# Altium PCB EHR.PcbDoc (part 3 of 4)
Units mm, origin at the board's own origin, x right, y up, seen from the top; angles counter-clockwise.
Board outline 200 x 110 mm, 2 copper layers (Top Layer, Bottom Layer), stack 1.646 mm thick; 17 components, 171 nets, 955 pads, 288 vias.
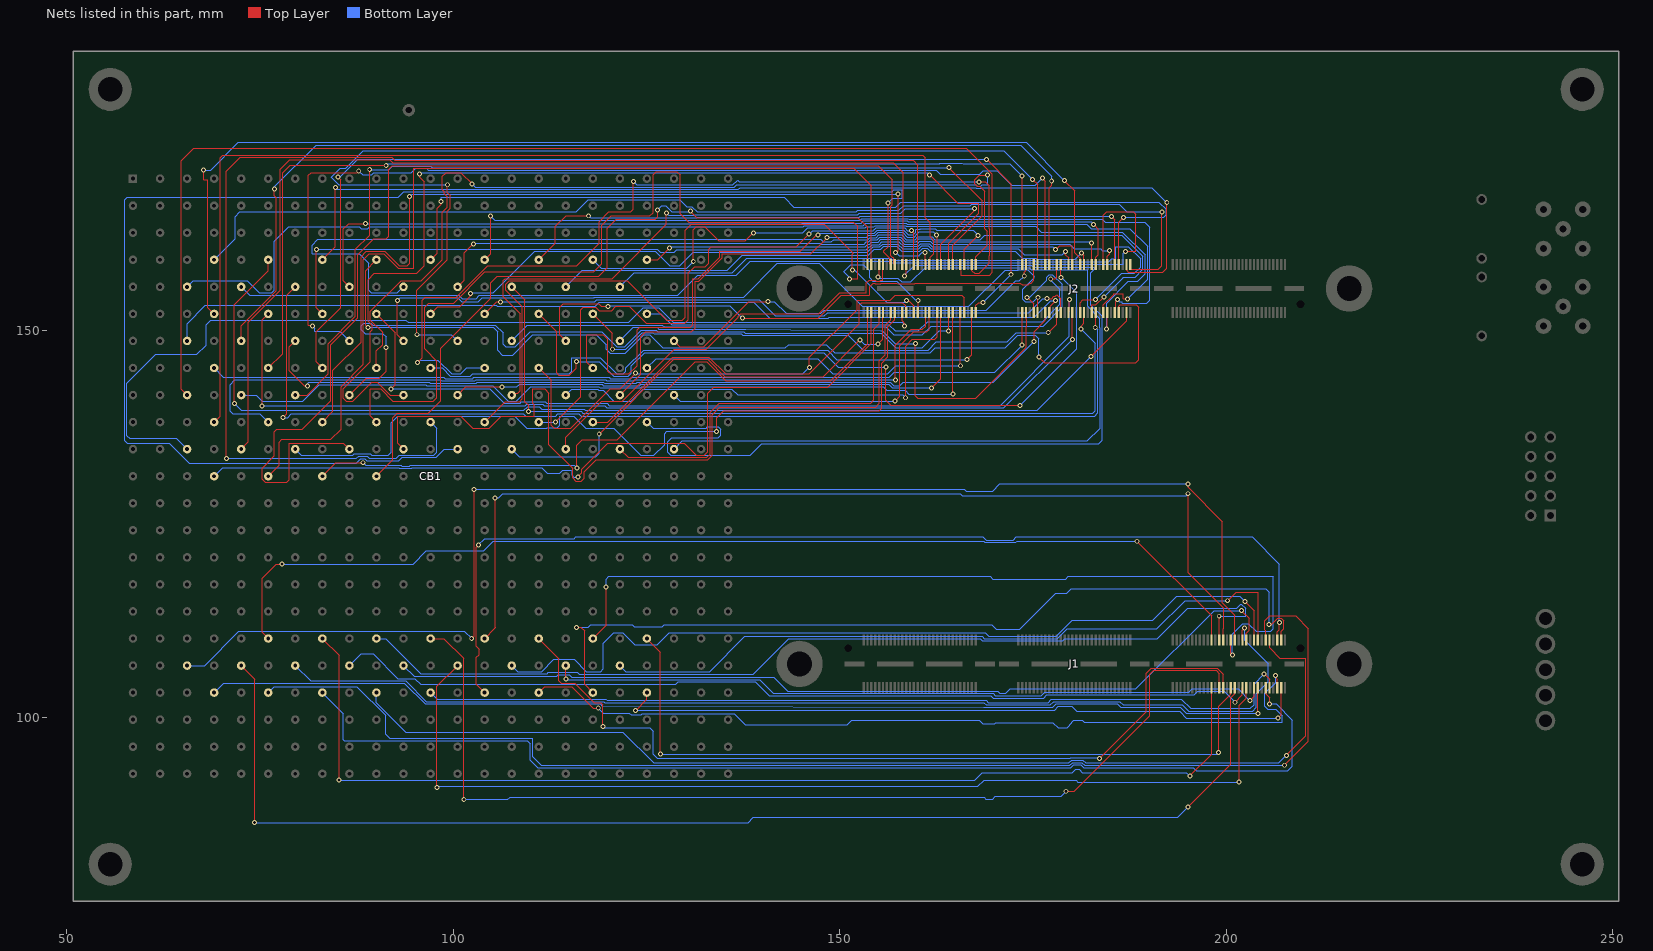
[diagram p3: the nets of this part, all layers, seen from the top]

## Via types
v1: diameter 0.64, hole 0.39, Top Layer to Bottom Layer, 288 vias

## Nets (pads, with @x,y where several pads share a name; then routed paths per layer and width w, separated by ;. In a path a pad name is that pad's centre, name@x,y a point inside that pad or via, vN(x,y) a via of type N, cw(c..) or ccw(c..) an arc to the next point about the centre after c; other vN are vias at no path point) (continued)
J1_141: CB1.397 J1.141 | length 140.2
  Top Layer w0.15: CB1.397@76.047,110.2 75.26,110.987 75.26,117.968 77.104,119.812 v1(77.8,119.812) ; v1(188.443,122.784) 198.091,113.135 J1.141@198.091,110.001
  Bottom Layer w0.15: v1(77.8,119.812) 94.793,119.812 96.52,121.539 103.915,121.539 105.159,122.784 168.616,122.784 168.775,122.624 172.771,122.624 172.93,122.784 v1(188.443,122.784)
J1_142: CB1.399 J1.142 | length 142.8
  Top Layer w0.15: CB1.399@83.047,110.2 85.204,108.043 v1(85.204,91.872) ; v1(195.296,92.413) 198.091,95.208 J1.142@198.091,103.829
  Bottom Layer w0.15: v1(85.204,91.872) 167.47,91.872 168.459,92.861 180.102,92.861 180.495,93.255 180.947,93.255 181.34,92.861 194.848,92.861 v1(195.296,92.413)
J1_145: CB1.401 J1.145 | length 126.3
  Top Layer w0.15: J1.145@199.092,110.001 v1(199.092,113.081)
  Bottom Layer w0.15: CB1.401@90.047,110.2 91.234,110.2 95.809,105.625 112.116,105.625 112.307,105.816 116.002,105.816 116.256,105.562 138.769,105.562 143.367,110.16 168.158,110.16 168.43,109.888 178.823,109.888 179.095,110.16 191.048,110.16 195.01,114.122 201.371,114.122 201.905,114.656 201.955,114.656 202.514,114.097 202.514,113.106 202.489,113.081 v1(199.092,113.081)
J1_146: CB1.403 J1.146 | length 133.6
  Top Layer w0.15: CB1.403@97.047,110.2 98.785,110.2 101.346,107.639 v1(101.346,89.375) ; v1(179.273,90.437) 180.327,90.437 190.119,100.228 190.119,105.58 190.611,106.073 198.673,106.073 199.092,105.654 J1.146@199.092,103.829
  Bottom Layer w0.15: v1(101.346,89.375) 107.056,89.375 107.344,89.662 168.67,89.662 168.91,89.422 169.76,89.422 170.124,89.786 178.623,89.786 v1(179.273,90.437)
J1_147: CB1.405 J1.147 | length 129.7
  Top Layer w0.15: CB1.405@104.047,110.2 105.448,111.601 105.422,111.627 105.422,128.385 v1(105.41,128.397) ; v1(195.072,128.93) 195.072,118.686 199.644,114.114 199.644,111.507 199.592,111.455 J1.147@199.592,110.001
  Bottom Layer w0.15: v1(105.41,128.397) 105.867,128.397 106.395,128.925 165.568,128.925 165.837,128.656 194.798,128.656 v1(195.072,128.93)
J1_148: CB1.407 J1.148 | length 109.9
  Top Layer w0.15: CB1.407@111.047,110.2 113.64,107.607 113.64,104.737 113.983,104.394 115.722,104.394 118.199,101.917 119.037,101.917 119.355,101.6 v1(119.355,98.793) ; v1(183.617,94.691) 189.664,100.738 189.664,105.727 190.309,106.372 198.822,106.372 199.592,105.603 J1.148@199.592,103.829
  Bottom Layer w0.15: v1(119.355,98.793) 119.523,98.625 125.412,98.625 125.832,98.206 125.832,95.225 126.365,94.691 179.81,94.691 179.874,94.755 183.553,94.755 v1(183.617,94.691)
J1_151: CB1.409 J1.151 | length 113
  Top Layer w0.15: CB1.409@118.047,110.2 119.785,111.938 119.761,111.962 v1(119.761,116.84) ; J1.151@200.593,110.001 200.593,108.271 v1(200.787,108.077)
  Bottom Layer w0.15: v1(119.761,116.84) 119.761,117.896 120.102,118.237 169.446,118.237 169.818,117.865 179.205,117.865 179.577,118.237 206.045,118.237 206.082,118.2 206.082,111.455 205.752,111.125 203.86,111.125 202.87,112.116 202.159,112.116 201.041,110.998 201.048,110.991 200.787,110.729 v1(200.787,108.077)
J1_152: CB1.411 J1.152 | length 97
  Top Layer w0.15: CB1.411@125.047,110.2 126.797,108.45 v1(126.797,95.25) ; v1(199.012,95.479) 199.012,101.412 200.593,102.993 J1.152@200.593,103.829
  Bottom Layer w0.15: v1(126.797,95.25) 198.783,95.25 v1(199.012,95.479)
J1_153: CB1.417 J1.153 | length 174
  Top Layer w0.15: v1(102.375,110.211) 102.672,110.508 102.672,129.438 v1(102.692,129.458) ; v1(195.072,130.175) 195.072,129.743 199.48,125.335 199.48,114.82 201.093,113.207 J1.153@201.093,110.001
  Bottom Layer w0.15: CB1.417@65.547,106.7 67.813,106.7 72.263,111.15 101.435,111.15 v1(102.375,110.211) ; v1(102.692,129.458) 102.759,129.525 166.12,129.525 166.375,129.27 169.779,129.27 170.711,130.203 195.044,130.203 v1(195.072,130.175)
J1_154: CB1.419 J1.154 | length 160.6
  Top Layer w0.15: CB1.419@72.547,106.7 74.295,104.952 v1(74.295,86.385) ; v1(195.072,88.417) 200.584,93.929 200.584,102.54 201.093,103.049 J1.154@201.093,103.829
  Bottom Layer w0.15: v1(74.295,86.385) 138.141,86.385 138.821,87.065 193.72,87.065 v1(195.072,88.417)
J1_157: CB1.421 J1.157 | length 141.2
  Top Layer w0.15: J1.157@202.094,110.001 202.094,111.263 v1(202.387,111.557)
  Bottom Layer w0.15: CB1.421@79.547,106.7 81.528,104.719 93.81,104.719 96.491,102.039 119.431,102.039 119.59,101.879 168.642,101.879 168.922,101.6 177.259,101.6 177.689,102.029 186.222,102.029 186.652,101.6 194.337,101.6 195.118,100.818 203.397,100.818 203.893,101.314 203.893,103.054 205.461,104.622 205.461,106.911 202.387,109.984 v1(202.387,111.557)
J1_158: CB1.423 J1.158 | length 121.1
  Top Layer w0.15: v1(201.143,101.952) 202.094,102.903 J1.158@202.094,103.829
  Bottom Layer w0.15: CB1.423@86.547,106.7 88.076,108.229 89.624,108.229 92.834,105.019 95.03,105.019 95.774,104.275 128.763,104.275 129.071,104.583 139.086,104.583 140.88,102.79 169.532,102.79 169.822,102.5 176.359,102.5 176.789,102.929 195.842,102.929 196.299,103.386 199.708,103.386 v1(201.143,101.952)
J1_159: CB1.425 J1.159 | length 118.9
  Top Layer w0.15: v1(201.955,113.817) 202.956,112.816 202.956,111.237 202.594,110.875 J1.159@202.594,110.001
  Bottom Layer w0.15: CB1.425@93.547,106.7 94.922,105.325 113.397,105.325 113.57,105.498 115.025,105.498 115.322,105.201 141.458,105.201 143.269,103.39 170.422,103.39 170.713,103.1 171.482,103.1 172.065,103.683 188.316,103.683 198.45,113.817 v1(201.955,113.817)
J1_160: CB1.427 J1.160 | length 133.8
  Top Layer w0.15: v1(97.866,90.907) 97.866,104.019 CB1.427@100.547,106.7 ; v1(201.676,91.617) 201.676,101.545 202.594,102.464 J1.160@202.594,103.829
  Bottom Layer w0.15: v1(97.866,90.907) 98.025,91.066 107.056,91.066 107.063,91.059 167.863,91.059 168.662,91.858 180.566,91.858 180.807,91.617 v1(201.676,91.617)
J1_163: CB1.429 J1.163 | length 109.9
  Top Layer w0.15: v1(202.438,114.96) 203.595,113.803 J1.163@203.595,110.001
  Bottom Layer w0.15: CB1.429@107.547,106.7 108.322,105.925 111.437,105.925 113.005,107.493 115.621,107.493 117.196,105.918 119.062,105.918 119.405,106.261 119.405,109.603 120.777,110.975 121.92,110.975 123.472,109.423 126.363,109.423 127.914,110.975 168.806,110.975 169.293,110.488 177.988,110.488 180.048,112.547 190.5,112.547 193.599,115.646 201.752,115.646 v1(202.438,114.96)
J1_164: CB1.431 J1.164 | length 94
  Top Layer w0.15: CB1.431@114.547,106.7 114.547,104.96 v1(114.554,104.953) ; v1(203.048,102.159) 203.595,102.706 J1.164@203.595,103.829
  Bottom Layer w0.15: v1(114.554,104.953) 114.623,104.883 139.611,104.883 141.405,103.09 169.832,103.09 170.122,102.8 176.059,102.8 176.488,103.229 195.152,103.229 195.609,103.686 201.52,103.686 v1(203.048,102.159)
J1_165: CB1.433 J1.165 | length 93.6
  Top Layer w0.15: v1(200.177,115.087) 201.295,116.205 204.089,116.205 J1.165@204.095,110.001
  Bottom Layer w0.15: CB1.433@121.547,106.7 122.329,105.918 133.147,105.918 137.693,110.465 168.427,110.465 168.704,110.188 178.133,110.188 179.4,111.455 191.033,111.455 194.666,115.087 v1(200.177,115.087)
J1_166: CB1.441 J1.166 | length 140.8
  Top Layer w0.15: v1(204.095,100.518) J1.166@204.095,103.829
  Bottom Layer w0.15: CB1.441@69.047,103.2 70.266,104.419 93.671,104.419 96.352,101.739 118.974,101.739 119.29,101.422 168.622,101.3 177.559,101.3 177.989,101.729 185.922,101.729 186.352,101.3 194.037,101.3 194.818,100.518 v1(204.095,100.518)
J1_169: CB1.443 J1.169 | length 167.1
  Top Layer w0.15: J1.169@205.096,110.001 205.096,111.25 204.992,111.355 204.992,112.497 205.608,113.113 208.959,113.113 210.591,111.481 210.591,96.876 v1(207.518,93.802)
  Bottom Layer w0.15: CB1.443@76.047,103.2 76.835,103.988 87.528,103.988 91.249,100.267 91.249,97.816 91.757,97.307 110.236,97.307 110.261,97.282 110.261,94.932 111.392,93.802 179.77,93.802 180.122,94.155 181.32,94.155 181.672,93.802 v1(207.518,93.802)
J1_170: CB1.445 J1.170 | length 145.5
  Top Layer w0.15: J1.170@205.096,103.829 205.096,103.082 205.613,102.565 v1(205.613,101.727)
  Bottom Layer w0.15: CB1.445@83.047,103.2 85.75,100.497 85.75,97.079 85.852,96.977 109.537,96.977 109.931,96.584 109.931,94.463 110.896,93.497 179.889,93.497 180.247,93.855 181.195,93.855 181.553,93.497 195.723,93.497 196.116,93.105 207.976,93.105 208.534,93.662 208.534,99.644 206.451,101.727 v1(205.613,101.727)
J1_171: CB1.447 J1.171 | length 142.8
  Top Layer w0.15: J1.171@205.596,110.001 205.596,108.974 206.9,107.671 210.261,107.671 210.287,107.645 210.287,97.587 v1(207.772,95.072)
  Bottom Layer w0.15: CB1.447@90.047,103.2 90.047,101.908 93.86,98.095 121.92,98.095 125.908,94.107 179.65,94.107 179.998,94.455 181.444,94.455 181.792,94.107 206.807,94.107 v1(207.772,95.072)
J1_172: CB1.449 J1.172 | length 114.5
  Top Layer w0.15: v1(204.911,105.613) 205.596,104.927 J1.172@205.596,103.829
  Bottom Layer w0.15: CB1.449@97.047,103.2 97.908,102.339 119.741,102.339 119.89,102.19 168.932,102.19 169.222,101.9 176.959,101.9 177.389,102.329 194.208,102.329 195.381,101.155 203.097,101.155 203.593,101.651 203.593,104.295 v1(204.911,105.613)
J1_175: CB1.451 J1.175 | length 135.7
  Top Layer w0.15: v1(103.251,122.301) 102.972,122.022 102.972,109.17 103.334,108.808 103.334,108.108 102.972,107.746 102.972,104.275 CB1.451@104.047,103.2 ; J1.175@206.597,110.001 206.597,111.055 206.883,111.341 v1(206.883,112.268)
  Bottom Layer w0.15: v1(103.251,122.301) 104.075,123.125 115.622,123.125 115.839,123.342 168.515,123.342 168.916,122.942 172.445,122.942 172.846,123.342 203.352,123.342 206.883,119.812 v1(206.883,112.268)
J1_176: CB1.453 J1.176 | length 109.9
  Top Layer w0.15: CB1.453@111.047,103.2 111.835,103.988 115.316,103.988 118.11,101.194 v1(118.745,101.194) ; v1(206.375,105.41) 206.375,105.162 206.597,104.94 J1.176@206.597,103.829
  Bottom Layer w0.15: v1(118.745,101.194) 119.38,100.559 122.758,100.559 123.012,100.305 124.282,100.305 124.46,100.482 136.322,100.482 137.781,99.023 150.955,99.023 151.576,99.643 168.032,99.643 168.5,99.175 170.04,99.175 170.19,99.326 170.207,99.326 177.569,99.326 178.252,98.642 179.423,98.642 179.742,98.961 179.742,99.071 180.276,99.605 181.366,99.605 181.632,99.339 207.213,99.339 207.239,99.365 207.239,100.228 206.412,101.055 205.387,101.055 205.003,101.439 205.003,103.136 206.375,104.507 v1(206.375,105.41)
J1_177: CB1.455 J1.177 | length 111.3
  Top Layer w0.15: v1(115.951,111.633) 116.51,111.633 116.967,111.176 116.967,104.28 CB1.455@118.047,103.2 ; v1(205.537,111.988) 205.832,111.988 206.657,112.813 207.109,112.813 207.428,112.494 207.428,111.462 207.098,111.131 J1.177@207.098,110.001
  Bottom Layer w0.15: v1(115.951,111.633) 117.424,111.633 117.751,111.96 123.137,111.96 123.372,111.725 127.022,111.725 127.257,111.96 169.664,111.96 170.219,111.405 173.294,111.405 177.946,116.058 179.364,116.058 179.944,116.637 205.105,116.637 205.537,116.205 v1(205.537,111.988)
J1_178: CB1.457 J1.178 | length 91
  Top Layer w0.15: v1(123.571,100.863) 125.047,102.339 CB1.457@125.047,103.2 ; v1(206.68,99.898) 207.098,100.316 J1.178@207.098,103.829
  Bottom Layer w0.15: v1(123.571,100.863) 123.654,100.946 177.806,100.946 178.289,101.429 179.991,101.429 180.664,100.757 193.98,100.757 194.838,99.898 v1(206.68,99.898)
J2_62: CB1.73 J2.62 | length 140.8
  Top Layer w0.15: J2.62@187.596,158.571 187.596,157.988 191.224,157.988 191.668,158.433 v1(191.668,165.405)
  Bottom Layer w0.15: CB1.73@69.047,159.2 71.772,161.925 71.772,164.787 72.39,165.405 115.905,165.405 117.475,166.975 129.322,166.975 130.203,166.094 130.848,166.094 131.537,165.405 152.146,165.405 152.349,165.608 157.653,165.608 158.249,166.204 166.879,166.204 167.042,166.367 186.132,166.367 187.094,165.405 v1(191.668,165.405)
J2_63: CB1.75 J2.63 | length 142.5
  Top Layer w0.15: v1(71.679,140.614) 71.679,153.391 76.047,157.759 CB1.75@76.047,159.2 ; v1(182.499,146.685) 187.095,151.281 J2.63@187.095,152.399
  Bottom Layer w0.15: v1(71.679,140.614) 72.568,139.725 109.11,139.725 109.591,140.207 111.111,140.207 111.442,139.875 116.91,139.875 117.06,139.725 175.539,139.725 v1(182.499,146.685)
J2_64: CB1.77 J2.64 | length 133.4
  Top Layer w0.15: CB1.77@83.047,159.2 84.722,160.875 v1(84.722,168.529) ; J2.64@187.095,158.571 187.095,157.836 187.324,157.607 191.795,157.607 192.303,158.115 v1(192.303,166.599)
  Bottom Layer w0.15: v1(84.722,168.529) 84.941,168.31 136.888,168.31 137.114,168.536 167.581,168.536 167.671,168.446 168.371,168.446 168.461,168.536 190.366,168.536 v1(192.303,166.599)
J2_67: CB1.79 J2.67 | length 131.2
  Top Layer w0.15: v1(88.951,150.444) 88.656,150.739 88.656,157.809 CB1.79@90.047,159.2 ; v1(175.768,146.596) 176.517,145.847 188.278,145.847 188.697,146.266 188.697,153.035 188.366,153.365 186.298,153.365 186.094,153.162 J2.67@186.094,152.399
  Bottom Layer w0.15: v1(88.951,150.444) 105.131,150.444 105.715,149.86 105.715,147.498 106.35,146.863 107.671,146.863 110.287,149.479 118.509,149.479 119.753,148.236 119.753,147.637 120.31,147.08 122.23,147.08 124.625,149.475 125.412,149.475 127.094,147.793 142.948,147.793 143.377,148.221 148.273,148.221 149.353,147.141 161.67,147.141 162.358,147.829 171.389,147.829 173.025,149.465 175.26,149.465 175.768,148.957 v1(175.768,146.596)
J2_68: CB1.81 J2.68 | length 116.4
  Top Layer w0.15: CB1.81@97.047,159.2 97.917,160.07 97.917,165.862 98.425,166.37 v1(98.425,166.751) ; J2.68@186.094,158.571 186.094,164.05 v1(186.727,164.682)
  Bottom Layer w0.15: v1(98.425,166.751) 98.425,167.275 142.783,167.275 144.03,166.028 157.258,166.028 157.897,166.667 191.295,166.667 192.227,165.735 192.227,164.998 191.911,164.682 v1(186.727,164.682)
J2_69: CB1.83 J2.69 | length 107.9
  Top Layer w0.15: CB1.83@104.047,159.2 104.826,159.979 v1(104.826,164.846) ; J2.69@185.594,152.399 185.674,152.479 185.674,153.797 v1(185.928,154.051)
  Bottom Layer w0.15: v1(104.826,164.846) 105.334,164.338 152.654,164.338 152.849,164.533 158.872,164.533 158.968,164.437 183.949,164.437 184.328,164.059 189.484,164.059 190.119,163.424 190.119,153.987 189.7,153.568 186.563,153.568 186.563,153.797 186.182,153.797 v1(185.928,154.051)
J2_70: CB1.85 J2.70 | length 84.4
  Top Layer w0.15: CB1.85@111.047,159.2 113.208,161.361 113.208,163.512 114.592,164.897 v1(117.5,164.897) ; v1(185.134,164.827) 185.594,164.367 J2.70@185.594,158.571
  Bottom Layer w0.15: v1(117.5,164.897) 117.759,164.638 131.506,164.638 131.58,164.712 152.527,164.712 152.661,164.846 159.366,164.846 159.385,164.827 v1(185.134,164.827)
J2_73: CB1.87 J2.73 | length 94.2
  Top Layer w0.15: v1(131.039,158.979) 131.039,163.093 131.42,163.475 132.511,163.475 134.315,161.671 137.795,161.671 v1(138.811,162.687) ; v1(184.531,150.241) 184.593,150.303 J2.73@184.593,152.399
  Bottom Layer w0.15: CB1.87@118.047,159.2 119.122,158.125 130.185,158.125 v1(131.039,158.979) ; v1(138.811,162.687) 145.212,162.687 145.859,163.334 153.289,163.334 153.404,163.449 154.386,163.449 154.57,163.633 158.499,163.633 158.62,163.511 175.35,163.511 176.073,162.789 186.563,162.789 189.516,159.835 189.516,157.404 188.537,156.425 187.325,156.425 184.506,153.605 184.531,153.58 v1(184.531,150.241)
J2_74: CB1.89 J2.74 | length 63.8
  Top Layer w0.15: CB1.89@125.047,159.2 126.459,159.2 v1(127.991,160.731) ; J2.74@184.593,158.571 184.593,159.65 184.912,159.969 v1(184.912,160.401)
  Bottom Layer w0.15: v1(127.991,160.731) 128.168,160.909 153.289,160.909 153.591,161.211 153.842,161.211 154.098,161.466 154.949,161.466 155.316,161.833 157.753,161.833 158.365,161.221 159.992,161.221 160.363,161.592 161.68,161.592 162.061,161.211 179.758,161.211 180.34,160.63 183.744,160.63 183.972,160.401 v1(184.912,160.401)
J2_75: CB1.95 J2.75 | length 147.5
  Top Layer w0.15: J2.75@184.093,152.399 184.093,153.365 185.42,154.692 185.42,154.813 186.69,154.813 186.69,154.138 v1(187.244,154.138)
  Bottom Layer w0.15: CB1.95@65.547,155.7 66.336,156.489 73.33,156.489 74.905,154.915 76.517,154.915 76.835,155.232 76.835,161.625 78.71,163.5 87.826,163.5 88.08,163.246 88.916,163.246 89.17,163.5 145.29,163.5 145.424,163.634 153.035,163.634 153.334,163.933 158.623,163.933 158.745,163.811 181.973,163.811 182.537,163.247 187.527,163.247 189.816,160.958 189.816,156.711 v1(187.244,154.138)
J2_76: CB1.97 J2.76 | length 135.8
  Top Layer w0.15: J2.76@184.093,158.571 184.093,164.967 184.544,165.417 187.947,165.417 188.265,165.1 188.265,160.274 v1(186.944,160.274)
  Bottom Layer w0.15: CB1.97@72.547,155.7 73.637,154.61 100.711,154.61 101.143,154.178 102.946,154.178 103.378,154.61 117.96,154.61 117.983,154.633 129.029,154.633 131.622,157.225 136.625,157.225 138.43,159.029 156.316,159.029 156.525,158.82 175.057,158.82 175.282,158.596 186.69,158.596 186.69,160.02 v1(186.944,160.274)
J2_79: CB1.99 J2.79 | length 136.8
  Top Layer w0.15: v1(77.978,138.788) 78.472,139.282 78.472,154.625 CB1.99@79.547,155.7 ; v1(183.05,150.447) 183.092,150.489 J2.79@183.092,152.399
  Bottom Layer w0.15: v1(77.978,138.788) 78.565,138.788 79.052,139.275 109.057,139.275 109.343,138.989 113.218,138.989 113.504,139.275 116.233,139.275 116.519,138.989 182.969,138.989 183.363,139.382 183.363,150.134 v1(183.05,150.447)
J2_80: CB1.101 J2.80 | length 111.2
  Top Layer w0.15: CB1.101@86.547,155.7 85.75,156.497 85.75,163.195 86.436,163.881 v1(88.621,163.881) ; v1(182.829,163.792) 183.464,163.157 183.464,159.884 183.092,159.512 J2.80@183.092,158.571
  Bottom Layer w0.15: v1(88.621,163.881) 145.071,163.881 145.124,163.934 152.758,163.934 153.057,164.233 158.747,164.233 158.869,164.111 182.51,164.111 v1(182.829,163.792)
J2_81: CB1.103 J2.81 | length 138.9
  Top Layer w0.15: J2.81@182.592,152.399 182.592,153.318 182.626,153.352 183.146,153.352 v1(184.207,154.413)
  Bottom Layer w0.15: CB1.103@93.547,155.7 92.762,154.915 89.37,154.915 89.027,155.257 89.027,158.775 87.808,159.995 82.601,159.995 82.575,159.969 81.737,159.969 81.712,159.995 81.712,161.112 82.448,161.849 147.509,161.849 147.825,161.532 148.916,161.532 149.195,161.812 153.594,161.812 153.849,162.066 154.7,162.066 155.067,162.433 158.002,162.433 158.613,161.821 159.744,161.821 160.114,162.192 161.929,162.192 162.309,161.812 168.193,161.812 168.763,162.382 186.488,162.382 189.216,159.654 189.216,157.949 188.239,156.972 186.69,156.972 186.69,156.897 v1(184.207,154.413)
J2_82: CB1.105 J2.82 | length 90.3
  Top Layer w0.15: CB1.105@100.547,155.7 101.422,156.575 101.422,160.096 v1(102.591,161.265) ; J2.82@182.592,158.571 v1(182.592,161.392)
  Bottom Layer w0.15: v1(102.591,161.265) 102.677,161.351 147.407,161.351 147.525,161.232 153.162,161.232 153.441,161.511 153.718,161.511 153.973,161.766 154.825,161.766 155.191,162.133 157.878,162.133 158.489,161.521 159.868,161.521 160.239,161.892 161.804,161.892 162.185,161.511 182.472,161.511 v1(182.592,161.392)
J2_85: CB1.107 J2.85 | length 104.2
  Top Layer w0.15: CB1.107@107.547,155.7 109.236,154.011 109.236,140.84 109.728,140.348 v1(109.728,139.573) ; v1(181.229,150.241) 181.229,150.622 181.591,150.984 J2.85@181.591,152.399
  Bottom Layer w0.15: v1(109.728,139.573) 109.73,139.575 116.529,139.575 116.76,139.344 182.702,139.344 183.058,139.7 183.058,148.412 v1(181.229,150.241)
J2_86: CB1.109 J2.86 | length 71.9
  Top Layer w0.15: v1(181.28,160.083) 181.591,159.772 J2.86@181.591,158.571
  Bottom Layer w0.15: CB1.109@114.547,155.7 116.672,157.825 135.422,157.825 137.363,159.766 153.67,159.766 154.47,160.566 155.322,160.566 155.688,160.933 157.38,160.933 157.992,160.321 160.365,160.321 160.736,160.692 161.307,160.692 161.688,160.311 172.685,160.311 173.576,159.42 175.375,159.42 175.536,159.259 180.455,159.259 v1(181.28,160.083)
J2_87: CB1.111 J2.87 | length 83.5
  Top Layer w0.15: J2.87@181.091,152.399 181.091,153.67 181.459,154.038 v1(183.059,154.038)
  Bottom Layer w0.15: CB1.111@121.547,155.7 123.372,157.525 136.082,157.525 137.936,159.379 156.566,159.379 156.825,159.12 175.218,159.12 175.38,158.959 184.782,158.959 185.183,159.36 185.674,159.36 185.674,160.909 187.325,160.909 188.916,159.318 188.916,158.258 188.103,157.445 186.466,157.445 v1(183.059,154.038)
J2_88: CB1.119 J2.88 | length 146.1
  Top Layer w0.15: v1(67.691,170.815) 67.691,169.545 68.25,169.545 68.25,152.997 CB1.119@69.047,152.2 ; v1(179.07,169.443) 180.391,168.123 180.391,160.122 181.091,159.422 J2.88@181.091,158.571
  Bottom Layer w0.15: v1(67.691,170.815) 68.58,170.815 72.161,174.396 174.117,174.396 v1(179.07,169.443)
J2_91: CB1.121 J2.91 | length 124.5
  Top Layer w0.15: v1(75.26,140.31) 75.26,151.413 CB1.121@76.047,152.2 ; v1(180.09,148.873) J2.91@180.09,152.399
  Bottom Layer w0.15: v1(75.26,140.31) 109.27,140.31 109.467,140.507 111.576,140.507 111.774,140.31 119.587,140.31 119.872,140.025 171.242,140.025 v1(180.09,148.873)
J2_92: CB1.123 J2.92 | length 110.6
  Top Layer w0.15: v1(82.271,160.528) 82.271,152.976 CB1.123@83.047,152.2 ; v1(177.927,160.528) 178.435,161.036 180.086,161.036 180.086,160.033 180.09,160.029 J2.92@180.09,158.571
  Bottom Layer w0.15: v1(82.271,160.528) 82.318,160.575 126.375,160.575 126.775,160.175 128.547,160.175 128.9,160.528 153.416,160.528 153.799,160.911 153.967,160.911 154.222,161.166 155.073,161.166 155.44,161.533 157.629,161.533 158.241,160.921 160.116,160.921 160.487,161.292 161.556,161.292 161.937,160.911 177.546,160.911 177.546,160.909 v1(177.927,160.528)
J2_93: CB1.125 J2.93 | length 109.9
  Top Layer w0.15: CB1.125@90.047,152.2 92.456,149.791 92.456,143.002 v1(91.948,142.494) ; J2.93@179.589,152.399 179.705,152.514 v1(179.705,154.051)
  Bottom Layer w0.15: v1(91.948,142.494) 104.729,142.494 106.598,140.625 108.622,140.625 108.804,140.807 111.876,140.807 112.069,140.614 119.883,140.614 120.172,140.325 170.729,140.325 179.705,149.301 v1(179.705,154.051)
J2_94: CB1.127 J2.94 | length 90.6
  Top Layer w0.15: CB1.127@97.047,152.2 97.965,153.118 100.794,153.118 102.362,154.686 v1(102.235,154.813) ; v1(179.197,160.274) 179.197,159.879 179.589,159.487 J2.94@179.589,158.571
  Bottom Layer w0.15: v1(102.235,154.813) 102.337,154.915 105.181,154.915 110.542,160.275 126.122,160.275 127.972,158.425 129.322,158.425 131.044,160.147 153.543,160.147 154.007,160.611 154.091,160.611 154.346,160.866 155.197,160.866 155.564,161.233 157.505,161.233 158.116,160.621 160.241,160.621 160.611,160.992 161.432,160.992 161.813,160.611 173.091,160.611 173.834,159.869 178.792,159.869 v1(179.197,160.274)
J2_97: CB1.129 J2.97 | length 79.2
  Top Layer w0.15: CB1.129@104.047,152.2 105.593,153.746 v1(106.121,153.746) ; v1(176.784,154.178) 177.41,154.178 177.701,154.469 177.889,154.469 178.081,154.661 178.589,154.152 J2.97@178.589,152.399
  Bottom Layer w0.15: v1(106.121,153.746) 118.266,153.746 118.552,154.032 139.545,154.032 141.617,151.96 148.017,151.96 148.418,152.361 174.459,152.361 176.276,154.178 v1(176.784,154.178)
J2_98: CB1.131 J2.98 | length 100
  Top Layer w0.15: CB1.131@111.047,152.2 113.347,149.9 113.347,144.564 113.665,144.247 114.986,144.247 115.913,145.174 v1(115.913,146.012) ; v1(155.956,145.301) 155.956,141.021 156.616,140.36 v1(173.33,140.36) ; J2.98@178.589,158.571 178.589,156.971 v1(178.638,156.921)
  Bottom Layer w0.15: v1(115.913,146.012) 118.885,146.012 120.772,144.125 122.622,144.125 123.013,144.515 123.013,145.466 124.739,147.193 147.9,147.193 149.793,145.301 v1(155.956,145.301) ; v1(173.33,140.36) 180.645,147.676 180.645,154.915 v1(178.638,156.921)
J2_99: CB1.133 J2.99 | length 67.9
  Top Layer w0.15: CB1.133@118.047,152.2 120.578,149.669 v1(120.578,147.625) ; v1(176.969,149.765) 178.088,150.885 J2.99@178.088,152.399
  Bottom Layer w0.15: v1(120.578,147.625) 122.292,147.625 124.442,149.775 125.822,149.775 125.978,149.618 137.256,149.618 137.459,149.415 151.118,149.415 153.016,147.516 161.445,147.516 162.499,148.571 171.654,148.571 172.848,149.765 v1(176.969,149.765)
J2_100: CB1.135 J2.100 | length 62.1
  Top Layer w0.15: v1(177.292,156.718) 177.863,156.718 178.088,156.943 J2.100@178.088,158.571
  Bottom Layer w0.15: CB1.135@125.047,152.2 126.862,152.2 128.243,150.818 156.337,150.818 157.168,149.987 160.147,149.987 161.366,151.206 176.251,151.206 178.472,153.428 178.472,155.398 177.292,156.578 v1(177.292,156.718)
J2_103: CB1.141 J2.103 | length 119.5
  Top Layer w0.15: J2.103@177.088,152.399 177.211,152.522 177.211,153.216 177.919,153.924 v1(177.927,153.924)
  Bottom Layer w0.15: CB1.141@65.547,148.7 65.547,150.922 67.914,153.289 105.58,153.289 105.668,153.201 118.329,153.201 118.86,153.732 138.882,153.732 140.955,151.66 148.487,151.66 148.605,151.778 175.155,151.778 177.301,153.924 v1(177.927,153.924)
J2_104: CB1.143 J2.104 | length 138
  Top Layer w0.15: CB1.143@72.547,148.7 72.547,150.66 77.064,155.176 77.064,167.259 76.835,167.488 v1(76.835,168.377) ; J2.104@177.088,158.571 177.088,168.515 177.419,168.846 v1(177.419,169.418)
  Bottom Layer w0.15: v1(76.835,168.377) 76.835,168.631 82.245,174.041 173.418,174.041 177.419,170.04 v1(177.419,169.418)
J2_105: CB1.145 J2.105 | length 109
  Top Layer w0.15: CB1.145@79.547,148.7 78.772,147.925 78.772,144.824 80.721,142.875 v1(81.153,142.875) ; v1(175.133,148.641) 175.133,149.911 176.587,151.365 J2.105@176.587,152.399
  Bottom Layer w0.15: v1(81.153,142.875) 81.153,143.256 81.272,143.375 96.859,143.375 97.009,143.225 102.942,143.225 103.092,143.375 119.422,143.375 119.572,143.225 123.644,143.225 123.794,143.375 156.512,143.375 156.973,142.914 157.746,142.914 158.207,143.375 169.867,143.375 v1(175.133,148.641)
J2_106: CB1.147 J2.106 | length 134.5
  Top Layer w0.15: v1(81.788,150.622) 81.661,150.749 81.255,150.749 81.255,170.142 81.597,170.485 87.554,170.485 v1(87.757,170.688) ; v1(176.213,169.761) 176.587,169.386 J2.106@176.587,158.571
  Bottom Layer w0.15: v1(81.788,150.622) 82.042,150.368 82.042,149.962 85.285,149.962 CB1.147@86.547,148.7 ; v1(87.757,170.688) 88.265,170.18 89.431,170.18 89.726,170.475 94.557,170.475 95.112,171.03 96.534,171.03 96.749,170.815 162.458,170.815 162.992,170.282 168.115,170.282 168.557,170.724 170.398,170.724 172.263,168.859 175.311,168.859 v1(176.213,169.761)
J2_109: CB1.149 J2.109 | length 102.9
  Top Layer w0.15: v1(92.761,153.949) 92.761,149.486 CB1.149@93.547,148.7 ; J2.109@175.586,152.399 175.586,154.297 v1(175.641,154.352)
  Bottom Layer w0.15: v1(92.761,153.949) 93.116,154.305 100.584,154.305 101.092,153.797 103.251,153.797 103.759,154.305 118.225,154.305 118.252,154.332 137.543,154.332 141.935,158.725 147.345,158.725 152.908,153.162 166.7,153.162 171.411,157.873 173.064,157.873 173.089,157.898 174.334,157.898 175.133,157.099 175.133,156.845 173.699,155.411 173.699,154.079 174.018,153.76 175.049,153.76 v1(175.641,154.352)
J2_110: CB1.151 J2.110 | length 147.3
  Top Layer w0.15: v1(95.275,149.504) 95.275,155.278 99.212,159.215 99.212,165.506 99.568,165.862 99.568,167.538 99.212,167.894 v1(99.212,168.91) ; v1(174.951,169.587) 175.586,168.952 J2.110@175.586,158.571
  Bottom Layer w0.15: v1(95.275,149.504) 99.743,149.504 CB1.151@100.547,148.7 ; v1(99.212,168.91) 85.192,168.91 84.201,169.901 85.369,171.069 86.081,171.069 88.316,173.304 171.234,173.304 v1(174.951,169.587)
J2_111: CB1.153 J2.111 | length 85.8
  Top Layer w0.15: v1(174.244,154.305) 174.324,154.305 175.086,153.543 J2.111@175.086,152.399
  Bottom Layer w0.15: CB1.153@107.547,148.7 109.587,150.74 127.042,150.74 127.264,150.518 155.933,150.518 156.972,149.479 160.655,149.479 161.798,150.622 176.301,150.622 178.772,153.093 178.772,156.009 177.518,157.263 177.066,157.263 176.747,156.944 176.747,156.541 174.511,154.305 v1(174.244,154.305)
J2_112: CB1.155 J2.112 | length 72
  Top Layer w0.15: CB1.155@114.547,148.7 113.767,149.48 113.767,153.035 114.224,153.492 118.796,153.492 119.126,153.162 v1(120.015,153.162) ; v1(137.389,151.663) 147.218,151.663 150.19,154.635 153.822,154.635 153.848,154.661 153.848,155.727 154.305,156.185 154.532,156.185 154.59,156.127 155.29,156.127 155.348,156.185 157.378,156.185 157.48,156.083 159.664,156.083 159.766,156.185 173.355,156.185 173.584,155.956 174.371,155.956 174.6,156.185 174.743,156.185 175.086,156.528 J2.112@175.086,158.571
  Bottom Layer w0.15: v1(120.015,153.162) 120.128,153.275 135.777,153.275 v1(137.389,151.663)
J2_115: CB1.157 J2.115 | length 68.3
  Top Layer w0.15: v1(159.791,148.361) 159.791,141.605 160.109,141.287 167.576,141.287 174.142,147.853 174.142,150.565 J2.115@174.085,152.399
  Bottom Layer w0.15: CB1.157@121.547,148.7 123.287,150.44 126.357,150.44 126.579,150.218 137.856,150.218 155.321,150.043 155.519,150.043 157.201,148.361 v1(159.791,148.361)
J2_116: CB1.159 J2.116 | length 52.3
  Top Layer w0.15: CB1.159@128.547,148.7 129.322,147.925 132.368,147.925 138.24,153.797 v1(140.716,153.797) ; v1(173.863,157.099) 173.863,157.582 174.085,157.804 J2.116@174.085,158.571
  Bottom Layer w0.15: v1(140.716,153.797) 141.529,153.797 143.066,152.26 147.561,152.26 147.98,152.679 168.961,152.679 172.745,156.464 173.228,156.464 v1(173.863,157.099)
J2_117: CB1.165 J2.117 | length 111.3
  Top Layer w0.15: v1(173.585,148.159) J2.117@173.585,152.399
  Bottom Layer w0.15: CB1.165@69.047,145.2 70.254,143.993 98.766,143.993 98.934,143.825 102.491,143.825 102.641,143.975 120.172,143.975 120.322,143.825 122.922,143.825 123.072,143.975 156.384,143.975 157.037,144.629 170.054,144.629 v1(173.585,148.159)
J2_118: CB1.167 J2.118 | length 134.3
  Top Layer w0.15: CB1.167@76.047,145.2 77.912,147.065 77.912,170.444 78.892,171.425 v1(91.313,171.425) ; J2.118@173.585,158.571 v1(173.585,170.026)
  Bottom Layer w0.15: v1(91.313,171.425) 91.542,171.653 162.916,171.653 162.941,171.679 165.862,171.679 165.938,171.602 172.009,171.602 v1(173.585,170.026)
J2_121: CB1.169 J2.121 | length 134.7
  Top Layer w0.15: CB1.169@83.047,145.2 82.271,145.976 82.271,149.86 85.433,153.022 85.433,169.583 v1(85.09,169.926) ; J2.121@167.593,152.399 167.593,153.314 167.949,153.67 v1(168.529,153.67) ; v1(168.986,172.187) 172.174,168.999 v1(172.174,157.328)
  Bottom Layer w0.15: v1(85.09,169.926) 85.395,169.926 87.655,172.187 v1(168.986,172.187) ; v1(168.529,153.67) 168.529,153.683 v1(172.174,157.328)
J2_122: CB1.171 J2.122 | length 119.1
  Top Layer w0.15: CB1.171@90.047,145.2 90.047,147.451 90.83,148.234 90.83,149.835 89.256,151.409 89.256,152.514 93.231,156.489 95.834,156.489 98.552,159.207 98.552,165.354 99.187,165.989 99.187,167.386 98.806,167.767 98.806,168.021 98.552,168.275 98.552,169.977 99.06,170.485 100.965,170.485 v1(102.438,169.012) ; J2.122@167.593,158.571 167.593,159.614 169.083,161.104 169.083,162.916 168.783,163.216 168.783,168.097 168.134,168.746 167.795,168.746 167.476,169.065 167.476,169.559 168.072,170.155 v1(169.088,170.155)
  Bottom Layer w0.15: v1(102.438,169.012) 102.84,168.61 136.327,168.61 136.652,168.935 167.606,168.935 167.795,168.746 168.247,168.746 168.436,168.935 169.139,168.935 169.164,168.961 169.164,170.078 v1(169.088,170.155)
J2_123: CB1.173 J2.123 | length 81.2
  Top Layer w0.15: v1(166.446,146.279) 167.093,146.925 J2.123@167.093,152.399
  Bottom Layer w0.15: CB1.173@97.047,145.2 98.538,145.2 99.613,144.125 102.21,144.125 102.509,144.424 114.986,144.424 115.341,144.78 115.341,146.533 115.367,146.558 118.994,146.558 121.127,144.425 121.967,144.425 122.322,144.78 122.322,145.207 124.608,147.493 148.413,147.493 149.628,146.279 v1(166.446,146.279)
J2_124: CB1.175 J2.124 | length 116.1
  Top Layer w0.15: v1(95.377,145.923) 95.961,146.507 95.961,153.987 96.34,154.366 100.366,154.366 104.419,158.42 115.951,158.42 118.847,161.315 118.847,164.147 120.117,165.417 122.974,165.417 123.292,165.735 v1(123.292,169.342) ; J2.124@167.093,158.571 167.093,157.797 167.436,157.455 168.008,157.455 169.329,158.775 169.329,159.708 169.383,159.762 169.383,163.157 169.329,163.211 169.329,168.763 168.801,169.291 v1(168.021,169.291)
  Bottom Layer w0.15: v1(95.377,145.923) 95.682,146.228 97.968,146.228 99.771,144.425 100.966,144.425 101.741,145.2 CB1.175@104.047,145.2 ; v1(123.292,169.342) 123.724,168.91 136.179,168.91 136.763,169.494 136.966,169.291 v1(168.021,169.291)
J2_127: CB1.177 J2.127 | length 72.4
  Top Layer w0.15: CB1.177@111.047,145.2 112.661,143.586 112.661,137.783 113.03,137.414 115.189,137.414 120.307,142.532 121.589,142.532 v1(123.584,144.526) ; v1(146.071,145.284) 146.071,146.61 152.227,152.766 152.227,153.949 152.267,153.989 156.54,153.989 157.186,154.635 165.762,154.635 166.092,154.305 J2.127@166.092,152.399
  Bottom Layer w0.15: v1(123.584,144.526) 123.685,144.424 145.212,144.424 v1(146.071,145.284)
J2_128: CB1.179 J2.128 | length 79.9
  Top Layer w0.15: CB1.179@118.047,145.2 117.272,145.975 117.272,149.454 117.297,149.479 119.418,149.479 119.99,148.907 119.99,144.767 120.332,144.424 122.707,144.424 123.774,145.491 123.774,150.177 124.092,150.495 130.645,150.495 130.962,150.812 130.962,156.743 130.988,156.769 131.681,156.769 134.472,159.56 134.472,160.274 134.497,160.299 144.856,160.299 146.99,162.433 v1(147.193,162.433) ; J2.128@166.092,158.571 166.092,160.542 v1(167.907,162.357)
  Bottom Layer w0.15: v1(147.193,162.433) 147.193,162.636 147.223,162.666 154.452,162.666 154.818,163.033 158.25,163.033 158.862,162.421 159.495,162.421 159.814,162.741 159.814,163.093 159.905,163.183 160.401,163.183 160.413,163.195 162.357,163.195 162.56,162.992 167.272,162.992 v1(167.907,162.357)
J2_129: CB1.181 J2.129 | length 49.2
  Top Layer w0.15: v1(165.591,145.491) J2.129@165.591,152.399
  Bottom Layer w0.15: CB1.181@125.047,145.2 126.253,146.406 147.168,146.406 149.098,144.475 156.21,144.475 157.226,145.491 v1(165.591,145.491)
J2_130: CB1.187 J2.130 | length 156.1
  Top Layer w0.15: CB1.187@65.547,141.7 64.77,142.477 64.77,171.999 66.431,173.66 166.357,173.66 169.683,170.334 169.683,157.516 169.316,157.15 165.617,157.15 J2.130@165.591,158.571
J2_133: CB1.189 J2.133 | length 106
  Top Layer w0.15: J2.133@164.591,152.399 164.591,151.689 164.643,151.637 v1(164.643,141.834)
  Bottom Layer w0.15: CB1.189@72.547,141.7 74.479,141.7 75.26,140.919 80.505,140.919 82.625,143.039 96.454,143.039 96.568,142.925 105.119,142.925 107.119,140.925 108.159,140.925 110.009,142.775 118.822,142.775 118.972,142.625 124.244,142.625 124.394,142.775 155.595,142.775 156.056,142.314 158.447,142.314 158.928,141.834 v1(164.643,141.834)
J2_134: CB1.191 J2.134 | length 125.2
  Top Layer w0.15: CB1.191@79.547,141.7 81.096,141.7 83.822,144.426 83.822,148.363 87.325,151.867 87.325,160.553 89.179,162.408 v1(89.179,170.866) ; v1(164.1,171.12) 168.398,166.821 168.398,164.893 164.591,161.086 J2.134@164.591,158.571
  Bottom Layer w0.15: v1(89.179,170.866) 91.643,170.866 92.107,171.33 97.06,171.33 97.27,171.12 v1(164.1,171.12)
J2_135: CB1.193 J2.135 | length 99.6
  Top Layer w0.15: CB1.193@86.547,141.7 88.721,143.874 90.407,143.874 91.288,144.755 v1(91.288,147.879) ; v1(164.084,149.987) 164.09,149.993 J2.135@164.09,152.399
  Bottom Layer w0.15: v1(91.288,147.879) 91.288,149.225 90.856,149.657 88.582,149.657 88.088,150.151 88.088,150.66 88.417,150.989 89.315,150.989 89.56,150.744 105.435,150.744 106.451,149.728 106.451,148.273 106.799,147.925 107.983,147.925 109.969,149.911 119.177,149.911 121.163,147.925 122.149,147.925 124.312,150.089 126.272,150.089 126.442,149.918 137.585,149.918 137.788,149.715 155.339,149.715 157.238,147.816 160.681,147.816 162.852,149.987 v1(164.084,149.987)
J2_136: CB1.195 J2.136 | length 130.5
  Top Layer w0.15: CB1.195@93.547,141.7 91.846,141.7 90.163,143.383 89.459,143.383 86.995,140.919 86.14,140.919 85.772,141.287 85.772,142.494 89.256,145.978 89.256,149.911 89.51,150.165 89.51,150.698 88.956,151.252 88.956,156.647 89.789,157.48 95.261,157.48 96.215,158.434 96.215,169.291 95.631,169.875 v1(95.631,170.307) ; v1(161.62,170.18) 165.279,166.521 167.97,166.496 167.97,165.202 164.09,161.322 J2.136@164.09,158.571
  Bottom Layer w0.15: v1(95.631,170.307) 95.809,170.485 161.315,170.485 v1(161.62,170.18)
J2_139: CB1.197 J2.139 | length 72.5
  Top Layer w0.15: CB1.197@100.547,141.7 101.595,142.748 v1(106.299,142.748) ; v1(161.867,142.614) 163.09,143.836 J2.139@163.09,152.399
  Bottom Layer w0.15: v1(106.299,142.748) 108.229,142.748 108.556,143.075 119.272,143.075 119.422,142.925 124.094,142.925 124.244,143.075 156.312,143.075 156.773,142.614 v1(161.867,142.614)
J2_140: CB1.199 J2.140 | length 91.5
  Top Layer w0.15: CB1.199@107.547,141.7 107.764,141.917 108.313,141.917 108.636,142.24 108.636,152.248 106.472,154.411 106.472,156.567 106.68,156.775 120.555,156.775 127.559,163.779 v1(127.559,165.227) ; J2.140@163.09,158.571 163.09,161.197 167.424,165.532 v1(167.424,165.822)
  Bottom Layer w0.15: v1(127.559,165.227) 127.848,164.938 131.121,164.938 131.206,165.024 152.324,165.024 152.538,165.238 157.861,165.238 158.445,165.822 v1(167.424,165.822)
J2_141: CB1.201 J2.141 | length 60.5
  Top Layer w0.15: v1(158.521,141.351) 158.521,148.043 159.385,148.906 162.271,148.906 162.589,149.225 J2.141@162.589,152.399
  Bottom Layer w0.15: CB1.201@114.547,141.7 115.322,142.475 118.672,142.475 118.822,142.325 119.372,142.325 120.772,140.925 123.022,140.925 124.572,142.475 136.024,142.475 136.767,141.732 158.14,141.732 v1(158.521,141.351)
J2_142: CB1.203 J2.142 | length 60.9
  Top Layer w0.15: CB1.203@121.547,141.7 124.257,144.41 124.257,149.225 124.909,149.878 130.81,149.878 131.272,150.34 131.272,156.413 131.297,156.439 131.775,156.439 134.798,159.461 134.798,159.95 134.823,159.975 146.259,159.975 v1(148.361,162.077) ; v1(162.484,162.408) 162.589,162.302 J2.142@162.589,158.571
  Bottom Layer w0.15: v1(148.361,162.077) 148.405,162.121 153.48,162.121 153.725,162.366 154.576,162.366 154.943,162.733 158.126,162.733 158.738,162.121 159.619,162.121 160.114,162.616 160.114,162.654 160.274,162.814 162.077,162.814 v1(162.484,162.408)
J2_145: CB1.205 J2.145 | length 43.3
  Top Layer w0.15: v1(157.149,140.919) 157.759,141.53 157.759,148.082 159.512,149.835 159.512,149.86 161.271,149.86 161.588,150.177 J2.145@161.588,152.399
  Bottom Layer w0.15: CB1.205@128.547,141.7 129.328,140.919 v1(157.149,140.919)
J2_146: CB1.211 J2.146 | length 140.6
  Top Layer w0.15: CB1.211@69.047,138.2 69.825,138.978 69.825,172.415 70.155,172.745 160.719,172.745 161.061,172.403 161.061,164.643 161.696,164.008 161.696,162.154 162.179,161.671 162.179,159.995 161.696,159.512 161.696,159.239 161.588,159.131 J2.146@161.588,158.571
J2_147: CB1.213 J2.147 | length 106.7
  Top Layer w0.15: v1(157.201,143.675) 157.201,148.133 159.258,150.19 160.655,150.19 161.088,150.623 J2.147@161.088,152.399
  Bottom Layer w0.15: CB1.213@76.047,138.2 74.979,139.268 71.438,139.268 71.12,139.586 71.12,143.053 71.742,143.675 98.316,143.675 98.466,143.525 102.794,143.525 102.944,143.675 119.722,143.675 119.872,143.525 123.344,143.525 123.494,143.675 v1(157.201,143.675)
J2_148: CB1.215 J2.148 | length 116.6
  Top Layer w0.15: CB1.215@83.047,138.2 84.422,139.575 84.422,144.899 88.056,148.533 88.056,159.607 88.723,160.275 91.122,160.275 92.977,158.42 94.005,158.42 94.336,158.75 v1(94.336,167.373) ; v1(157.226,160.147) 157.48,160.401 157.582,160.401 157.582,167.64 v1(157.531,167.691) ; v1(161.036,160.147) 161.036,159.027 161.163,158.9 161.036,158.773 161.163,158.646 J2.148@161.088,158.571
  Bottom Layer w0.15: v1(94.336,167.373) 94.653,167.691 v1(157.531,167.691) ; v1(157.226,160.147) 157.251,160.147 157.658,159.741 160.274,159.741 160.274,159.766 160.655,160.147 v1(161.036,160.147)
J2_151: CB1.217 J2.151 | length 124.5
  Top Layer w0.15: CB1.217@90.047,138.2 89.256,138.991 89.256,142.469 89.281,142.494 90.576,142.494 92.151,140.919 97.384,140.919 97.841,141.376 97.841,146.101 96.266,147.676 96.266,153.035 96.825,153.594 100.018,153.594 104.056,157.632 118.161,157.632 119.202,158.674 119.202,163.639 120.434,164.871 125.412,164.871 125.832,165.29 125.832,170.18 126.263,170.612 128.905,170.612 129.337,170.18 129.337,165.176 130.429,164.084 151.765,164.084 152.324,163.525 152.324,156.769 152.273,156.718 v1(151.244,156.718) ; J2.151@160.087,152.399 160.147,152.459 v1(160.147,153.924)
  Bottom Layer w0.15: v1(151.244,156.718) 151.244,156.934 150.495,157.683 151.384,158.572 153.035,158.572 153.848,157.759 153.848,156.845 154.28,156.413 157.395,156.413 159.884,153.924 v1(160.147,153.924)
J2_152: CB1.219 J2.152 | length 172.6
  Top Layer w0.15: v1(70.637,133.502) 70.637,170.637 72.442,172.442 92.045,172.442 92.427,172.06 159.469,172.06 160.087,171.441 J2.152@160.087,158.571
  Bottom Layer w0.15: v1(70.637,133.502) 87.445,133.502 87.732,133.789 88.852,133.789 89.135,133.505 92.603,133.505 93.021,133.923 97.472,133.923 97.841,134.291 97.841,137.406 CB1.219@97.047,138.2
J2_153: CB1.221 J2.153 | length 95.5
  Top Layer w0.15: CB1.221@104.047,138.2 106.698,140.851 108.585,140.851 108.936,141.202 108.936,153.094 106.772,155.257 106.772,156.023 107.224,156.475 122.493,156.475 127.61,151.359 129.591,151.359 130.023,151.79 130.023,163.03 130.768,163.775 148.014,163.775 151.765,160.024 151.638,159.897 v1(151.638,157.861) ; v1(158.623,153.924) 158.902,153.924 159.587,153.239 J2.153@159.587,152.399
  Bottom Layer w0.15: v1(151.638,157.861) 151.917,157.861 156.058,153.721 158.42,153.721 v1(158.623,153.924)
J2_154: CB1.223 J2.154 | length 76.7
  Top Layer w0.15: v1(113.206,138.2) 116.458,141.452 116.458,152.718 116.804,153.063 118.421,153.063 118.867,152.617 120.486,152.617 121.031,153.162 122.784,153.162 124.968,150.978 129.934,150.978 130.404,151.447 130.404,157.505 131.216,158.318 132.588,158.318 133.02,158.75 133.02,160.553 133.35,160.884 144.374,160.884 v1(145.999,162.509) ; v1(159.269,162.966) 159.587,162.649 J2.154@159.587,158.571
  Bottom Layer w0.15: CB1.223@111.047,138.2 v1(113.206,138.2) ; v1(145.999,162.509) 146.468,162.978 147.419,162.978 147.43,162.966 154.305,162.966 154.407,163.068 154.429,163.068 154.694,163.333 158.375,163.333 158.741,162.966 v1(159.269,162.966)
J2_157: CB1.225 J2.157 | length 51.1
  Top Layer w0.15: CB1.225@118.047,138.2 119.988,138.2 128.397,146.609 133.042,146.609 135.226,144.425 146.051,144.425 152.527,150.901 152.527,153.352 152.844,153.67 158.098,153.67 158.479,153.289 J2.157@158.586,152.399
J2_158: CB1.227 J2.158 | length 126.7
  Top Layer w0.15: v1(158.369,157.086) 158.369,157.201 158.586,157.418 J2.158@158.586,158.571
  Bottom Layer w0.15: CB1.227@125.047,138.2 125.833,137.414 132.69,137.414 132.842,137.566 134.302,137.566 134.62,137.249 134.62,136.487 134.302,136.169 128.27,136.169 127.762,135.661 127.762,134.302 128.156,133.909 138.405,133.909 139.903,135.407 183.515,135.407 183.972,135.865 183.972,150.722 183.961,150.734 183.961,151.878 182.499,153.34 182.499,157.531 183.007,158.039 183.007,158.09 182.88,158.217 175.061,158.217 174.779,158.498 159.666,158.498 158.369,157.201 v1(158.369,157.086)
J2_159: CB1.233 J2.159 | length 124.7
  Top Layer w0.15: J2.159@158.086,152.399 158.086,151.286 158.369,151.003 v1(158.369,150.622)
  Bottom Layer w0.15: CB1.233@65.547,134.7 64.128,136.119 58.102,136.119 57.76,136.462 57.76,143.205 61.519,146.964 66.802,146.964 67.996,148.158 67.996,150.825 68.58,151.409 93.853,151.409 94.158,151.105 122.707,151.105 124.578,152.975 126.562,152.975 128.419,151.118 158.078,151.118 158.369,150.827 v1(158.369,150.622)
J2_160: CB1.235 J2.160 | length 132.1
  Top Layer w0.15: CB1.235@72.547,134.7 73.482,135.635 73.482,151.125 77.612,155.255 77.612,170.944 78.81,172.142 91.779,172.142 92.167,171.755 156.896,171.755 158.177,170.473 158.177,158.86 158.086,158.86 J2.160@158.086,158.571
J2_163: CB1.237 J2.163 | length 102.2
  Top Layer w0.15: v1(134.061,137.008) 134.061,138.786 134.976,139.7 155.093,139.7 155.411,140.017 155.411,145.846 156.204,146.639 156.204,150.54 157.085,151.421 J2.163@157.085,152.399
  Bottom Layer w0.15: CB1.237@79.547,134.7 80.338,133.909 86.965,133.909 87.145,134.089 89.256,134.089 89.435,133.909 91.551,133.909 91.945,134.302 91.945,138.134 92.786,138.975 107.964,138.975 109.525,137.414 112.09,137.414 112.141,137.465 113.436,137.465 113.767,137.795 113.767,138.95 113.792,138.975 115.57,138.975 117.131,137.414 120.752,137.414 124.257,133.909 125.946,133.909 127.317,135.28 127.317,136.69 127.635,137.008 v1(134.061,137.008)
J2_164: CB1.239 J2.164 | length 143.9
  Top Layer w0.15: CB1.239@86.547,134.7 85.763,135.484 78.791,135.484 78.765,135.458 78.765,130.746 78.422,130.404 75.667,130.404 75.26,130.81 75.26,132.258 76.835,133.833 76.835,136.944 77.153,137.262 80.418,137.262 84.122,140.965 84.122,148.223 87.63,151.731 87.63,159.855 89.7,161.925 91.3,161.925 91.618,162.243 91.618,170.942 92.075,171.399 154.991,171.399 156.806,169.584 156.806,166.347 156.561,166.102 156.561,159.713 156.754,159.52 156.83,159.52 156.962,159.388 156.962,158.694 J2.164@157.085,158.571
J2_165: CB1.241 J2.165 | length 101.8
  Top Layer w0.15: CB1.241@93.547,134.7 92.772,135.475 92.772,138.938 92.809,138.975 100.965,138.975 102.526,137.414 104.611,137.414 106.186,138.989 110.49,138.989 110.49,140.411 110.261,140.64 110.261,142.469 110.287,142.494 111.798,142.494 112.361,141.931 112.361,135.297 115.418,132.241 115.418,130.975 115.862,130.531 116.522,130.531 116.93,130.938 116.93,131.789 118.466,133.325 132.936,133.325 133.505,133.893 133.505,139.169 134.47,140.134 154.623,140.134 155.111,140.623 155.111,146.146 155.904,146.939 155.904,150.754 156.585,151.435 J2.165@156.585,152.399
J2_166: CB1.243 J2.166 | length 189.3
  Top Layer w0.15: v1(156.261,166.573) 156.261,160.903 155.702,160.344 155.702,160.148 156.462,159.388 156.462,158.694 J2.166@156.585,158.571
  Bottom Layer w0.15: CB1.243@100.547,134.7 98.842,134.7 97.765,133.623 93.364,133.623 92.939,133.198 88.824,133.198 88.533,133.489 88.048,133.489 87.452,132.893 65.837,132.893 63.246,135.484 57.785,135.484 57.455,135.814 57.455,166.954 57.785,167.284 92.862,167.284 93.588,168.01 156.771,168.01 156.997,168.236 158.064,168.236 158.09,168.21 158.09,167.157 158.064,167.132 156.82,167.132 v1(156.261,166.573)
J2_169: CB1.245 J2.169 | length 62
  Top Layer w0.15: v1(118.872,136.652) 128.524,146.304 132.923,146.304 135.132,144.094 147.841,144.094 v1(152.59,148.844) ; v1(154.935,148.285) 155.584,148.934 J2.169@155.584,152.399
  Bottom Layer w0.15: CB1.245@107.547,134.7 108.541,133.706 118.427,133.706 118.872,134.15 v1(118.872,136.652) ; v1(152.59,148.844) 153.149,148.285 v1(154.935,148.285)
J2_170: CB1.247 J2.170 | length 53.9
  Top Layer w0.15: CB1.247@114.547,134.7 114.547,136.264 119.208,140.925 121.868,140.925 128.568,147.625 132.715,147.625 136.829,151.738 136.829,151.877 137.16,152.208 147.281,152.208 150.012,154.94 153.424,154.94 153.449,154.965 153.449,156.21 153.806,156.567 154.574,156.567 154.714,156.427 155.166,156.427 155.306,156.567 155.551,156.567 155.584,156.6 J2.170@155.584,158.571
J2_171: CB1.249 J2.171 | length 51.2
  Top Layer w0.15: CB1.249@121.547,134.7 122.622,133.625 132.812,133.625 133.205,134.017 133.205,139.464 134.4,140.659 153.987,140.659 154.39,141.062 154.39,150.22 155.084,150.913 J2.171@155.084,152.399
J2_172: CB1.251 J2.172 | length 107.3
  Top Layer w0.15: v1(154.94,156.972) 155.084,157.116 J2.172@155.084,158.571
  Bottom Layer w0.15: CB1.251@128.547,134.7 129.61,135.763 182.004,135.763 183.667,137.427 183.667,150.427 183.661,150.434 183.661,151.596 182.076,153.181 182.076,157.895 182.059,157.912 174.766,157.912 174.479,158.198 161.036,158.198 159.175,156.337 157.988,156.337 157.493,156.832 155.08,156.832 v1(154.94,156.972)
J2_175: CB1.257 J2.175 | length 103.9
  Top Layer w0.15: v1(116.103,131.089) 116.63,131.616 116.63,132.126 119.987,135.484 129.88,135.484 131.439,133.925 132.465,133.925 132.905,134.365 132.905,141.96 133.667,142.723 148.419,142.723 154.083,148.387 J2.175@154.083,152.399
  Bottom Layer w0.15: CB1.257@69.047,131.2 70.13,132.283 92.95,132.283 93.021,132.213 94.64,132.213 94.711,132.283 111.455,132.283 112.165,131.573 113.767,131.573 114.172,131.978 115.214,131.978 115.351,131.841 115.351,131.318 115.58,131.089 v1(116.103,131.089)
J2_176: CB1.259 J2.176 | length 127.7
  Top Layer w0.15: CB1.259@76.047,131.2 77.445,132.598 77.445,135.623 77.787,135.966 84.15,135.966 85.472,137.288 85.472,142.8 88.356,145.683 88.356,159.202 89.129,159.975 90.998,159.975 92.858,158.115 94.844,158.115 94.898,171.044 151.797,171.044 154.083,168.758 J2.176@154.083,158.571
J2_177: CB1.261 J2.177 | length 86
  Top Layer w0.15: CB1.261@83.047,131.2 84.791,132.944 v1(88.29,132.944) ; v1(115.976,132.278) 115.976,135.217 116.649,135.89 121.209,135.89 131.318,145.999 132.797,145.999 135.222,143.574 148.82,143.574 153.582,148.336 J2.177@153.582,152.399
  Bottom Layer w0.15: v1(88.29,132.944) 88.646,132.588 93.246,132.588 93.321,132.513 94.336,132.513 94.411,132.588 115.667,132.588 v1(115.976,132.278)
J2_178: CB1.263 J2.178 | length 95.9
  Top Layer w0.15: CB1.263@90.047,131.2 92.177,133.33 92.177,138.786 92.71,139.319 96.723,139.319 98.374,140.97 98.374,147.777 104.826,154.229 104.826,156.235 105.689,157.099 118.796,157.099 119.888,158.191 119.888,163.271 121.082,164.465 126.098,164.465 126.416,164.782 v1(126.416,165.659) ; v1(130.658,165.506) 131.496,164.668 152.312,164.668 153.582,163.398 J2.178@153.582,158.571
  Bottom Layer w0.15: v1(126.416,165.659) 126.949,166.192 127.459,166.192 128.246,165.405 130.556,165.405 v1(130.658,165.506)